# Altium PCB PCB3.PcbDoc
Units mil, origin at the board's own origin, x right, y up, seen from the top; angles counter-clockwise.
Board outline 6000 x 4000 mil, 2 copper layers (Top Layer, Bottom Layer); 144 components, 101 nets, 375 pads, 0 vias.
Unrouted connection lines stored in the file: 258.
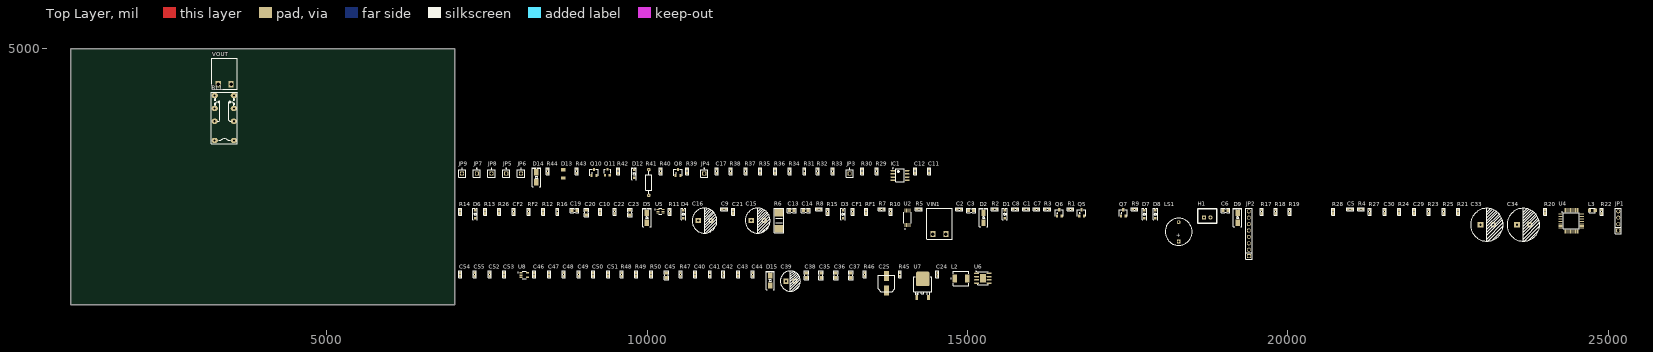
[diagram p0: Top Layer view]
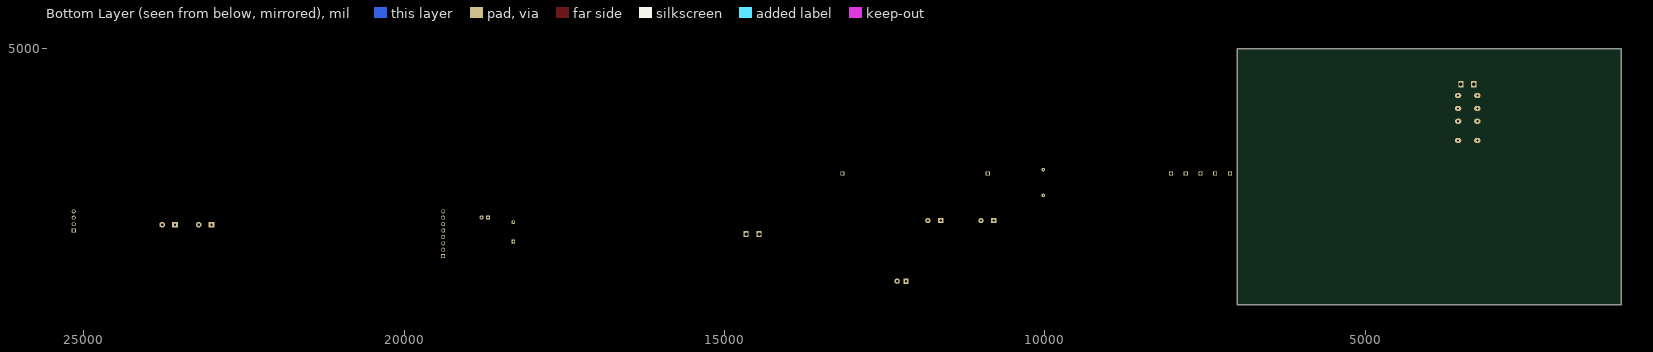
[diagram p1: Bottom Layer view, seen from below]

## Layer stack, top to bottom
Top Solder: solder mask 0.4, Solder Resist, Dk 3.5
Top Layer: signal copper 1.4
Dielectric 1: dielectric 12.6, FR-4, Dk 4.8
Bottom Layer: signal copper 1.4
Bottom Solder: solder mask 0.4, Solder Resist, Dk 3.5

## Board outline
1000,1000 7000,1000 7000,5000 1000,5000

## Design rules (kind name [scope] priority, off if disabled: settings)
Clearance [All] p1: gap=10 ignorepadtopadclearanceinfootprint=FALSE except(0: Arc-Hole Track-Hole SMDPad-Hole THPad-Hole Via-Hole Fill-Hole Poly-Hole Region-Hole Text-Hole)
DiffPairsRouting [All] p1: maxlimit=10 minlimit=10 mostfreqgap=10 toplayer_minwidth=15 toplayer_maxwidth=15 toplayer_prefwidth=15 bottomlayer_minwidth=15 bottomlayer_maxwidth=15 bottomlayer_prefwidth=15 maxuncoupledlength=500
PolygonConnect [All] p1: connectstyle=Relief reliefconductorwidth=10 reliefentries=4 polygonreliefangle="90 Angle" airgapwidth=10
RoomDefinition Solider [InComponentClass('Solider')] p1: confinementstyle=ConfineIn formatcopy=TRUE lockcomponents=FALSE outline 7045,2670 14530,2670 14530,3250 7045,3250
RoomDefinition Sheet2 [InComponentClass('Sheet2')] p2: confinementstyle=ConfineIn formatcopy=TRUE lockcomponents=FALSE outline 7045,1690 25270,1690 25270,2620 7045,2620
RoomDefinition power [InComponentClass('power')] p3: confinementstyle=ConfineIn formatcopy=TRUE lockcomponents=FALSE outline 7045,1060 15395,1060 15395,1640 7045,1640
RoutingVias [All] p1: holewidth=28 width=50 viastyle="Through Hole" minholewidth=28 minwidth=50 maxholewidth=28 maxwidth=50
SolderMaskExpansion [All] p1: expansion=4 istentingtop=FALSE
Width [All] p1: maxlimit=10 minlimit=10 preferedwidth=10
29 further rules are at their usual default settings.

## Classes and differential pairs
component class Solider: C11 C12 C17 D10 D11 D12 D13 D14 IC1 JP3 JP4 JP5 JP6 JP7 JP8 JP9 Q8 Q9 Q10 Q11 R29 R30 R31 R32 R33 R34 R35 R36 R37 R38 R39 R40 R41 R42 R43 R44
component class Sheet2: C1 C2 C3 C5 C6 C7 C8 C9 C10 C13 C14 C15 C16 C19 C20 C21 C22 C23 C26 C27 C28 C29 C30 C31 C32 C33 C34 CF1 CF2 D1 D2 D3 D4 D5 D6 D7 D8 D9 H1 JP1 JP2 L1 L3 LS1 NT1 NT2 NT3 NTC1 Q1 Q2 Q3 Q4 Q5 Q6 Q7 R1 R2 R3 R4 R5 R6 R7 R8 R9 R10 R11 R12 R13 R14 R15 R16 R17 R18 R19 R20 R21 R22 R23 R24 R25 R26 R27 R28 RF1 RF2 RL1 SW1 U1 U2 U3 U4 U5 VIN1 VOUT XT1
component class power: AMS1 C24 C25 C35 C36 C37 C38 C39 C40 C41 C42 C43 C44 C45 C46 C47 C48 C49 C50 C51 C52 C53 C54 C55 D15 L2 NT4 R45 R46 R47 R48 R49 R50 U6 U7 U8
differential pair SO1: +SO1_P -SO1_N

## Components (designator, comment, footprint, x,y, rotation, side; value= is the part's Value field where it differs from the comment)
C1 "104" "tu 0603" 15915,2490 r0 top
C2 "104" "tu 0603" 14870,2490 r0 top
C3 "104" "tu 0805" 15055,2475 r0 top
C5 "102" "tu 0603" 20970,2490 r0 top
C6 "10pF" "tu 0805" 19025,2475 r0 top
C7 "103" "tu 0603" 16075,2490 r0 top
C8 "104" "tu 0603" 15745,2490 r0 top
C9 "103" "tu 0603" 11200,2490 r0 top
C10 "104" "tu 0603" 9270,2455 r90 top
C11 "103" "tu 0603" 14400,3085 r90 top
C12 "104" "tu 0603" 14180,3085 r90 top
C13 "100" "tu 0805" 12255,2475 r0 top
C14 "100" "tu 0805" 12475,2475 r0 top
C15 "1000uF" "tu hoa 10mm" 11725,2315 r0 top
C16 "1000uF" "tu hoa 10mm" 10895,2315 r0 top
C17 "102" "tu 0603" 11085,3085 r90 top
C19 "100" "tu 0805" 8865,2475 r0 top
C20 "100" "tu 0805" 9050,2440 r90 top
C21 "104" "tu 0603" 11340,2455 r90 top
C22 "104" "tu 0603" 9490,2455 r90 top
C23 "104" "tu 0805" 9730,2440 r90 top
C24 "104" "tu 0603" 14530,1475 r90 top
C25 "220uF" "tu nhom 6.3 (d)" 13735,1335 r90 top
C29 "102" "tu 0603" 21970,2455 r90 top
C30 "102" "tu 0603" 21510,2455 r90 top
C33 "1000uF" "tu hoa 13mm" 23105,2250 r0 top
C34 "1000uF" "tu hoa 13mm" 23675,2250 r0 top
C35 "106" "tu 0805" 12715,1460 r90 top
C36 "106" "tu 0805" 12945,1460 r90 top
C37 "106" "tu 0805" 13180,1460 r90 top
C38 "22pF" "tu 0805" 12485,1460 r90 top
C39 "100uF" "tu hoa 8mm" 12235,1370 r0 top
C40 "104" "tu 0603" 10750,1475 r90 top
C41 "104" "tu 0603" 10980,1475 r90 top
C42 "104" "tu 0603" 11190,1475 r90 top
C43 "104" "tu 0603" 11420,1475 r90 top
C44 "104" "tu 0603" 11650,1475 r90 top
C45 "22pF" "tu 0805" 10300,1460 r90 top
C46 "104" "tu 0603" 8240,1475 r90 top
C47 "104" "tu 0603" 8470,1475 r90 top
C48 "104" "tu 0603" 8700,1475 r90 top
C49 "104" "tu 0603" 8930,1475 r90 top
C50 "104" "tu 0603" 9160,1475 r90 top
C51 "104" "tu 0603" 9390,1475 r90 top
C52 "106" "tu 0603" 7540,1475 r90 top
C53 "104" "tu 0603" 7770,1475 r90 top
C54 "106" "tu 0603" 7080,1475 r90 top
C55 "106" "tu 0603" 7310,1475 r90 top
CF1 "102" "tu 0603" 13210,2455 r90 top
CF2 "102" "tu 0603" 7920,2455 r90 top
D1 "S4" "DIODE SOD-123" 15580,2415 r90 top
D2 "SS34" "DIODE SMA" 15250,2360 r90 top
D3 "S4" "DIODE SOD-123" 13055,2415 r90 top
D4 "S4" "DIODE SOD-123" 10565,2415 r90 top
D5 "SS34" "DIODE SMA" 9995,2360 r90 top
D6 "S4" "DIODE SOD-123" 7315,2415 r90 top
D7 "S4" "DIODE SOD-123" 17760,2415 r90 top
D8 "S4" "DIODE SOD-123" 17930,2415 r90 top
D9 "SS34" "DIODE SMA" 19215,2360 r90 top
D12 "S4" "DIODE SOD-123" 9795,3045 r90 top
D13 "15V" "DIODE ZENNER SMD SOD80" 8690,3045 r90 top
D14 "SS34" "DIODE SMA" 8270,2990 r90 top
D15 "SS34" "DIODE SMA" 11920,1380 r90 top
H1 "FAN" XH2.54M-2 18690,2365 r0 top
IC1 "LM358 SOP8" "SOP 8" 13945,3020 r0 top
JP1 "debug" "JP 1x4 DT" 25155,2160 r90 top
JP2 "lcd_1.8 inch" "JP 1x8 DT" 19390,1760 r90 top
JP3 "SLEEP" "JP 1x1 DT" 13160,3050 r0 top
JP4 "TIP CHANGER" "JP 1x1 DT" 10890,3050 r0 top
JP5 "5" "JP 1x1 DT" 7800,3050 r0 top
JP6 "1" "JP 1x1 DT" 8030,3050 r0 top
JP7 "4" "JP 1x1 DT" 7340,3050 r0 top
JP8 "2" "JP 1x1 DT" 7570,3050 r0 top
JP9 "3" "JP 1x1 DT" 7110,3050 r0 top
L2 "10uH" "CUON CAM SMD 0530" 14900,1410 r0 top
L3 "LED 0805" LED-0805-Red 24705,2475 r0 top
LS1 "Coi Chip Speaker" "Coi Chip Speacker" 18295,1990 r90 top
Q5 "HF" SOT-23 16780,2435 r0 top value=C9014
Q6 "HF" SOT-23 16430,2435 r0 top value=C9014
Q7 "BC817" SOT-23 17430,2435 r0 top value=C9014
Q8 "BC817" SOT-23 10480,3065 r0 top value=C9014
Q10 "BC817" SOT-23 9170,3065 r0 top value=C9014
Q11 "BA" SOT23 9380,3070 r0 top
R1 "4.7K" "Tro smd 0603" 16605,2490 r0 top
R2 "2.2R" "Tro smd 0603" 15425,2490 r0 top
R3 "4.7K" "Tro smd 0603" 16245,2490 r0 top
R4 "10k" "tro smd 0603" 21140,2490 r0 top
R5 "10R" "Tro smd 0603" 14240,2490 r0 top
R6 "0.01R" "tro smd 2512" 12055,2315 r90 top
R7 "10R" "Tro smd 0603" 13660,2490 r0 top
R8 "2.2R" "Tro smd 0603" 12680,2490 r0 top
R9 "10k" "Tro smd 0603" 17605,2490 r0 top
R10 "22R" "Tro smd 0603" 13800,2455 r90 top
R11 "2.2R" "Tro smd 0603" 10350,2455 r90 top
R12 "10R" "Tro smd 0603" 8380,2455 r90 top
R13 "10R" "Tro smd 0603" 7470,2455 r90 top
R14 "2.2R" "Tro smd 0603" 7080,2455 r90 top
R15 "22R" "Tro smd 0603" 12820,2455 r90 top
R16 "22R" "Tro smd 0603" 8600,2455 r90 top
R17 "10k" "Tro smd 0603" 19590,2455 r90 top
R18 "10k" "Tro smd 0603" 19810,2455 r90 top
R19 "10k" "Tro smd 0603" 20030,2455 r90 top
R20 "10k" "tro smd 0603" 24015,2455 r90 top
R21 "10k" "tro smd 0603" 22660,2455 r90 top
R22 "10k" "Tro smd 0603" 24900,2455 r90 top
R23 "100k" "tro smd 0603" 22200,2455 r90 top
R24 "100k" "tro smd 0603" 21740,2455 r90 top
R25 "10k" "Tro smd 0603" 22430,2455 r90 top
R26 "22R" "Tro smd 0603" 7690,2455 r90 top
R27 "10k" "Tro smd 0603" 21280,2455 r90 top
R28 "10k" "Tro smd 0603" 20710,2455 r90 top
R29 "10k" "Tro smd 0603" 13585,3085 r90 top
R30 "100k" "Tro smd 0603" 13355,3085 r90 top
R31 "4.7k" "Tro smd 0603" 12455,3085 r90 top
R32 "100k" "Tro smd 0603" 12665,3085 r90 top
R33 "10R" "Tro smd 0603" 12895,3085 r90 top
R34 "10k" "Tro smd 0603" 12225,3085 r90 top
R35 "4.7k" "Tro smd 0603" 11765,3085 r90 top
R36 "1k" "Tro smd 0603" 11995,3085 r90 top
R37 "100k" "Tro smd 0603" 11535,3085 r90 top
R38 "10k" "Tro smd 0603" 11305,3085 r90 top
R39 "10R" "Tro smd 0603" 10625,3085 r90 top
R40 "4.7k" "Tro smd 0603" 10210,3085 r90 top
R41 "680R" "tro vach 1/4w" 10025,2910 r90 top
R42 "1k" "Tro smd 0603" 9550,3085 r90 top
R43 "1k" "Tro smd 0603" 8900,3085 r90 top
R44 "10R" "Tro smd 0603" 8450,3085 r90 top
R45 "100k" "tro smd 0603" 13945,1475 r90 top
R46 "100k" "tro smd 0603" 13395,1475 r90 top
R47 "100k" "tro smd 0603" 10520,1475 r90 top
R48 "25k" "tro smd 0603" 9600,1475 r90 top
R49 "100k" "tro smd 0603" 9830,1475 r90 top
R50 "100k" "tro smd 0603" 10060,1475 r90 top
RF1 "1K" "Tro smd 0603" 13420,2455 r90 top
RF2 "1K" "Tro smd 0603" 8150,2455 r90 top
RL1 "Relay 1A/5V" "Relay 8 Chan HK19F" 3250,3565 r90 top
U2 "INA240A4PWR" SOP65P640X120-8N 14060,2360 r90 top
U4 "STM32F103C8T6" LQFP-48_19.6_393_58X11_SMD 24420,2310 r0 top
U5 "INA199A3DCKR" SOT65P210X110-6N 10205,2460 r0 top
U6 "MP1584EN" SOIC127P600X170-9N 15240,1415 r0 top
U7 "78M12 SMD TO252" TO252 14300,1260 r0 top
U8 "LP5907MFX-2.85/NOPB" SOT95P280X145-5N 8080,1465 r0 top
VIN1 "CON 2 EDG5.08" "CON 2 2EDG5.08" 14460,2105 r0 top
VOUT "CON 2 EDG5.08" "CON 2 2EDG5.08" 3305,4445 r0 top

## Footprints (in the part's own frame and the unit in brackets; to place one, negate y for a bottom-side part, rotate by r counter-clockwise, add the part's x,y. Pads: shape width x height; smd on the part's side, far side on the other; paste and mask are expansions set on the pad)
"Coi Chip Speacker" [mm]
  rect 1.5x1.5 hole 0.8: 1(0,0)
  round 1.5 hole 0.8: 2(7.62,0.013)
  silkscreen extent -1.55,-5.38 9.18,5.36, body extent -2.22,-6 13.24,6, height 4.5
"CON 2 2EDG5.08" [mm]
  rect 2x2.5 hole 1.4: 1(0,0) 2(5.08,0)
  silkscreen extent -2.54,-2.03 7.62,10.21, body extent -2.5,-1.75 7.58,10.25, height 3.15
"CUON CAM SMD 0530" [mm] "CUON CAM SMD 0530"
  rect 1.8x3.1 smd: 1(-2.5,0) 2(2.5,0)
  silkscreen extent -4.1,-2.9 3.1,2.9, body extent -3.1,-2.88 3.1,2.92, height 3
"DIODE SMA" [mm] "SMA"
  rect 2.5x1.7 smd: 1(-2,0) 2(2,0)
  silkscreen extent -3.68,-1.65 3.75,1.65, body extent -2.6,-1.37 2.6,1.37, height 2.4
"DIODE SOD-123" [mm] "SOD-123"
  rect 0.9x0.95 smd: 1(-1.575,0) 2(1.575,0)
  silkscreen extent -2.3,-0.92 2.41,0.92, body extent -1.86,-0.78 1.86,0.77, height 1.35
"DIODE ZENNER SMD SOD80" [mm] "SOD80"
  rect 1.35x1.8 smd: 1(1.675,0) 2(-1.675,0)
  body extent -1.75,-0.76 1.75,0.74, height 1.45
"JP 1x1 DT" [mm] "1pins, 1 row, straight, gold plating"
  rect 1.6x1.6 hole 1.1: 1(0,0)
  silkscreen extent -1.4,-1.4 1.4,2.17, body extent -1.27,-1.27 1.27,1.27, height 8.54
"JP 1x4 DT" [mm] "4 pins, 1 row, straight, gold plating"
  rect 1.6x1.6 hole 1.1: 1(0,0)
  round 1.6 hole 1.1: 2(2.54,0) 3(5.08,0) 4(7.62,0)
  silkscreen extent -1.27,-1.27 8.89,1.27, body extent -1.27,-1.27 8.89,1.27, height 8.54
"JP 1x8 DT" [mm] "8 pins, 1 row, straight, gold plating"
  rect 1.6x1.6 hole 1.1: 1(0,0)
  round 1.6 hole 1.1: 2(2.54,0) 3(5.08,0) 4(7.62,0) 5(10.16,0) 6(12.7,0) 7(15.24,0) 8(17.78,0)
  silkscreen extent -1.27,-1.27 19.05,1.27, body extent -1.27,-1.27 19.05,1.27, height 8.54
LED-0805-Red [mil]
  rect 50x55 smd: 1(0,0) 2(90,0)
  silkscreen extent 0,-35 90,35, body extent 5,-25 85,25, height 43
LQFP-48_19.6_393_58X11_SMD [mm] "48LQFP"
  rect 1.7x0.3 smd mask+0.076: 1(-4.238,2.75) 2(-4.238,2.25) 3(-4.238,1.75) 4(-4.238,1.25) 5(-4.238,0.75) 6(-4.238,0.25) 7(-4.238,-0.25) 8(-4.238,-0.75) 9(-4.238,-1.25) 10(-4.238,-1.75) 11(-4.238,-2.25) 12(-4.238,-2.75) 25(4.238,-2.75) 26(4.238,-2.25) 27(4.238,-1.75) 28(4.238,-1.25) 29(4.238,-0.75) 30(4.238,-0.25) 31(4.238,0.25) 32(4.238,0.75) 33(4.238,1.25) 34(4.238,1.75) 35(4.238,2.25) 36(4.238,2.75)
  rect 0.3x1.7 smd mask+0.076: 13(-2.75,-4.238) 14(-2.25,-4.238) 15(-1.75,-4.238) 16(-1.25,-4.238) 17(-0.75,-4.238) 18(-0.25,-4.238) 19(0.25,-4.238) 20(0.75,-4.238) 21(1.25,-4.238) 22(1.75,-4.238) 23(2.25,-4.238) 24(2.75,-4.238) 37(2.75,4.238) 38(2.25,4.238) 39(1.75,4.238) 40(1.25,4.238) 41(0.75,4.238) 42(0.25,4.238) 43(-0.25,4.238) 44(-0.75,4.238) 45(-1.25,4.238) 46(-1.75,4.238) 47(-2.25,4.238) 48(-2.75,4.238)
  silkscreen extent -3.72,-3.15 3.15,3.72, body extent -4.5,-4.5 4.5,4.5, height 1.7
"Relay 8 Chan HK19F" [mil] "Reley DPDT, 8 pin, 1A, W400mil, L800mil,H 300mil"
  oval 80x100 hole 32: 1(500,0) 2(300,0) 3(701,0) 4(500,-300) 5(300,-300) 6(701,-300) 7(0,-300) 8(0,0)
  silkscreen extent -50,-349 752,51, body extent -59,-340 759,46, height 484
SOIC127P600X170-9N [mm]
  rrect54% 1.97x0.6 smd paste+0 mask+0.102: 1(-2.475,1.905) 2(-2.475,0.635) 3(-2.475,-0.635) 4(-2.475,-1.905) 5(2.475,-1.905) 6(2.475,-0.635) 7(2.475,0.635) 8(2.475,1.905)
  rect 2.41x3.3 smd paste-3 mask+0.102: 9(0,0)
  silkscreen extent -2.77,-2.5 2,2.84, body extent -3,-2.45 3,2.45, height 1.7
SOP65P640X120-8N [mm]
  rrect25% 1.57x0.41 smd: 1(-2.87,0.975) 2(-2.87,0.325) 3(-2.87,-0.325) 4(-2.87,-0.975) 5(2.87,-0.975) 6(2.87,-0.325) 7(2.87,0.325) 8(2.87,0.975)
  silkscreen extent -4.54,-1.5 2.2,1.5, body extent -3.2,-1.5 3.2,1.5, height 1.2
"SOP 8" [mm] "SOIC, 8-Leads, Body 4.9x3.9mm, Pitch 1.27mm, IPC High Density"
  oval 1.8x0.6 smd: 1(-2.825,1.905) 2(-2.825,0.635) 3(-2.825,-0.635) 4(-2.825,-1.905) 5(2.825,-1.905) 6(2.825,-0.635) 7(2.825,0.635) 8(2.825,1.905)
  silkscreen extent -2.95,-2.55 1.68,2.98, body extent -2.99,-2.45 3,2.45, height 1.6
SOT23 [mm] "SOT23"
  rect 0.9x0.95 smd: 1(-0.95,-1.25) 2(0,1.25)
  rect 0.9x0.95 smd mask+0: 3(0.95,-1.25)
  silkscreen extent -1.3,-0.38 1.3,1.25, body extent -1.52,-1.23 1.48,1.27, height 1.06
SOT65P210X110-6N [mm]
  rrect25% 1.19x0.4 smd: 1(-0.96,0.65) 2(-0.96,0) 3(-0.96,-0.65) 4(0.96,-0.65) 5(0.96,0) 6(0.96,0.65)
  silkscreen extent -2.2,-1.17 0.63,1.17, body extent -1.05,-1 1.05,1, height 1.1
SOT95P280X145-5N [mm]
  rrect25% 1.21x0.58 smd paste+0 mask+0.102: 1(-1.255,0.95) 2(-1.255,0) 3(-1.255,-0.95) 4(1.255,-0.95) 5(1.255,0.95)
  silkscreen extent -2.6,-1.56 0.8,1.56, body extent -1.4,-1.45 1.4,1.45, height 1.45
SOT-23 [mm] "SOT 23 _ 1-3-2"
  rect 0.85x1.2 smd: 1(-0.94,-1.245) 2(0.985,-1.25) 3(0.005,1.25)
  silkscreen extent -1.65,-1.27 1.65,1.27, body extent -1.47,-1.33 1.53,1.17, height 1.06
TO252 [mm] "TO252"
  round 0.5 on Mech15: 0(0,0)
  rrect25% 1x2 smd: 1(-2.285,-3.7) 3(2.285,-3.7)
  rrect25% 5.5x5.7 smd: 2(0,3.7)
  silkscreen extent -3.5,-2.7 3.5,4.5, body extent -3.3,-3.95 3.3,5.76, height 2.31
"Tro smd 0603" [mm] "Chip Capacitor, 2-Leads, Body 1,60x0,80mm, IPC Medium Density"
  rect 1x0.95 smd mask+0.076: 1(-0.75,0) 2(0.75,0)
  silkscreen extent -1.35,-0.58 1.37,0.58, body extent -0.82,-0.42 0.82,0.43, height 0.44
"tro smd 0603" [mm] "Chip Capacitor, 2-Leads, Body 1,60x0,80mm, IPC Medium Density"
  rect 1x0.95 smd mask+0.076: 1(-0.75,0) 2(0.75,0)
  silkscreen extent -1.35,-0.58 1.37,0.58, body extent -0.82,-0.42 0.82,0.43, height 0.44
"tro smd 2512" [mm]
  rect 3x3.3 smd: 1(-3.2,0) 2(3.2,0)
  silkscreen extent -4.9,-1.88 4.93,1.88, body extent -3.12,-1.57 3.18,1.58, height 0.82
"tro vach 1/4w" [mm]
  round 1.4 hole 0.6: 1(-5.1,0) 2(5.1,0)
  silkscreen extent -4.39,-1.25 4.42,1.25, body extent -5.38,-1.2 5.38,1.2, height 2.41
"tu 0603" [mm] "Chip Capacitor, 2-Leads, Body 1,60x0,80mm, IPC Medium Density"
  rect 1x0.95 smd mask+0.076: 1(-0.75,0) 2(0.75,0)
  silkscreen extent -1.35,-0.58 1.37,0.58, body extent -0.8,-0.4 0.8,0.4, height 0.9
"tu 0805" [mm] "Compoment SMD 80x50mil"
  rect 1.2x1.4 smd: 1(-0.946,-0.003) 2(0.954,-0.003)
  silkscreen extent -1.75,-0.89 1.75,0.89, body extent -1.01,-0.64 1.01,0.63, height 0.61
"tu hoa 8mm" [mm]
  rect 2.1x2.1 hole 0.9: 1(-1.75,0)
  round 2.1 hole 0.9: 2(1.75,0)
  silkscreen extent -4,-4 4,4, body extent -4.1,-4.07 4.1,4.13, height 13.81
"tu hoa 10mm" [mm]
  rect 2.1x2.1 hole 0.9: 1(-2.54,0)
  round 2.1 hole 0.9: 2(2.54,0)
  silkscreen extent -4.95,-4.96 4.93,4.92, body extent -5,-5 4.97,5, height 20.01
"tu hoa 13mm" [mm]
  rect 2.2x2.2 hole 0.9: 1(-2.54,0)
  round 2.2 hole 0.9: 2(2.54,0)
  silkscreen extent -6.5,-6.5 6.5,6.5, body extent -6.25,-6.25 6.26,6.25, height 23.02
"tu nhom 6.3 (d)" [mm]
  rect 4x2 smd: 1(-2.9,0) 2(2.9,0)
  silkscreen extent -3.3,-3.3 3.3,3.3, body extent -3.8,-3.3 3.8,3.3, height 8
XH2.54M-2 [mm]
  rect 1.6x1.6 hole 0.8: 1(0,0)
  round 1.6 hole 0.8: 2(2.54,0)
  silkscreen extent -2.48,-2.26 5.02,3.46, body extent -2.48,-2.26 5.02,3.48, height 6.91

## Part data
C1 C2 C21 C22 C40 C41 C42 C43 C44 C46 C47 C48 C49 C50 C51: library part "Tu 0603 101 50V 10%", "Dán", Chung_Loai=Dán, Don_Vi=Con, Ma_Hang=MH004565, So_Chan=2, Ten_Linh_Kien="Tụ 0603 101-0.1nF 10% 50V"
C3 C6 C23: library part "Tu 0805 101 50V 20%", "Dán", Chung_Loai=Dán, Don_Vi=Con, Ma_Hang=MH002806, So_Chan=2, Ten_Linh_Kien="Tụ 0805 101-0.1nF 50V 20%"
C5 C24 C29 C30: library part "Tu 0603 104 50V 10%", "Dán", Chung_Loai=Dán, Don_Vi=Con, Ma_Hang=MH004568, So_Chan=2, Ten_Linh_Kien="Tụ 0603 104-100nF 10% 50V"
C7 C8 C9 C10 C11 C12 C17 C52 C53 C54 C55 CF1 CF2: library part "Tu 0603 106 16V 20%", "Dán", Chung_Loai=Dán, Don_Vi=Con, Ma_Hang=MH004848, So_Chan=2, Ten_Linh_Kien="Tụ 0603-10uF 20% 16V"
C13 C14 C19 C20: library part "Tu 0805 104 50V 10%", "Dán", Chung_Loai=Dán, Don_Vi=Con, Ma_Hang=MH004551, So_Chan=2, Ten_Linh_Kien="Tụ 0805 104-100nF 10% 50V"
C15 C16: library part "Tu Hoa 1000uF 10V 10x12", "Cắm", Chung_Loai=Cắm, Don_Vi=Con, Ma_Hang=MH006614, So_Chan=2, Ten_Linh_Kien="Tụ Hóa 1000uF 10V 10x12MM"
C25: library part "Tu Nhom 220uF 16V", "Dán", Chung_Loai=Dán, Don_Vi=Con, Ma_Hang=MH002227, So_Chan=2, Ten_Linh_Kien="Tụ Nhôm 220uF 16V 6.3x7.7MM"
C33 C34: library part "Tu Hoa 1000uF 50V 13x26", "Cắm", Chung_Loai=Cắm, Don_Vi=Con, Ma_Hang=MH006619, So_Chan=2, Ten_Linh_Kien="Tụ Hóa 1000uF 50V"
C35 C36 C37 C38 C45: library part "Tu 0805 106 16V 10%", "Dán", Chung_Loai=Dán, Don_Vi=Con, Ma_Hang=MH004553, So_Chan=2, Ten_Linh_Kien="Tụ 0805 106-10uF 10% 16V"
C39: library part "Tu Hoa 100uF 35V 8x11", "Cắm", Chung_Loai=Cắm, Don_Vi=Con, Ma_Hang=MH002807, So_Chan=2, Ten_Linh_Kien="Tụ Hóa 100uF 35V 8x11MM"
D1 D3 D4 D6 D7 D8 D12: library part "Diode S4", "Dán", Chung_Loai=Dán, Don_Vi=Con, Ma_Hang=MH005519, Ten_Linh_Kien="Diode S4 SOD123 ( 1N5819 SOD123)"
D2 D5 D9 D14 D15: library part "Diode SS34 ( 1N5822 )", "Dán", Chung_Loai=Dán, Don_Vi=Con, Ma_Hang=MH002104, Ten_Linh_Kien="Diode SS34 3A 40V SMA ( 1N5822 SS34A)"
D13: library part "Diode Zener 15V", "Dán", Chung_Loai=Dán, Don_Vi=Con, Ma_Hang=MH002883, Ten_Linh_Kien="Diode Zener 1/2W 15V SMD1206 ZMM15"
H1: library part "Header 2P 2.54 Duc Thang", "Cắm", Chung_Loai=Cắm, Don_Vi=Con, Ma_Hang=MH001283, Ten_Linh_Kien="Header 2P XH2.54-2P Đực Thẳng"
IC1: "Dán", Chung_Loai=Dán, Don_Vi=Con, Ma_Hang=MH000609, Ten_Linh_Kien="LM358 SOP8"
JP1: library part "JP 1x4 2.54 Duc Thang", "Cắm", Chung_Loai=Cắm, Don_Vi=Con, Ma_Hang=MH000903, Ten_Linh_Kien="Jump Đơn Đực 2.54MM 1x40P Thẳng 11MM"
JP2: library part "JP 1x8 2.54 Duc Thang", "Cắm", Chung_Loai=Cắm, Don_Vi=Con, Ma_Hang=MH000903, Ten_Linh_Kien="Jump Đơn Đực 2.54MM 1x40P Thẳng 11MM"
JP3 JP4 JP5 JP6 JP7 JP8 JP9: library part "JP 1x1 2.54 Duc Cong", "Cắm", Chung_Loai=Cắm, Don_Vi=Con, Ma_Hang=MH000904, Ten_Linh_Kien="Jump Đơn Đực 2.54MM 1x40P Cong Đứng"
L2: library part "Cuon Cam SMD 0530", "SMD 0530", Package=None, Availability=Unavailable, MP=FDV0530-H-1R5M=P3, Price=None
L3: library part "LED 0805 Do", "Dán", Chung_Loai=Dán, Don_Vi=Con, Ma_Hang=MH000897, Ten_Linh_Kien="LED 0805 Màu Đỏ (Red)"
LS1: "Còi chip"
Q5 Q6: library part "Trans C1815 HF SMD", "SOT-23"
Q7 Q8 Q10: library part "Trans BC817", "SOT-23 - C8658"
Q11: library part "Trans A1015 BA SMD", "PNP 600mW, ECB"
R1 R2 R3 R5 R7 R8 R9 R10 R11 R12 R13 R14 R15 R16 R17 R18 R19 R22 R25 R26 R27 R28 R29 R30 R31 R32 R33 R34 R35 R36 R37 R38 R39 R40 R42 R43 R44 RF1 RF2: library part "Tro 0603 5% 10R", "Dán", Chung_Loai=Dán, Don_Vi=Con, Ma_Hang=MH006317, So_Chan=2, Ten_Linh_Kien="Trở 0603 5% 10R"
R4 R20 R21 R23 R24: library part "Tro 0603 5% 10k", "Dán", Chung_Loai=Dán, Don_Vi=Con, Ma_Hang=MH006316, So_Chan=2, Ten_Linh_Kien="Trở 0603 5% 10k"
R6: library part "Tro 2512 1% 0.01R", "Dán", Chung_Loai=Dán, Don_Vi=Con, Ma_Hang=MH004912, So_Chan=2, Ten_Linh_Kien="Trở 2512 1% R010-0.01R 1W"
R41: library part "Tro Vach 1/4W 5% 680R", "Cắm", Chung_Loai=Cắm, Don _Vi=Con, Ma_Hang=MH007331, So_Chan=2, Ten_Linh_Kien="Trở Vạch 1/4w 5% 680R"
R45 R46 R47 R48 R49 R50: library part "Tro 0603 1% 0R", "Dán", Chung_Loai=Dán, Don_Vi=Con, Ma_Hang=MH005792, So_Chan=2, Ten_Linh_Kien="Trở 0603 1% 0R"
RL1: library part "Relay 8 Chan HK19F", "Relay 8 Chan HK19F", Ma_Hang=MH001504, Ten="Relay 5V1A 8 Chân HK19F-DC05V-SHG"
U2: "-4 to 80V, bidirectional, ultra-precise current sense amplifier with enhanced PWM rejection", Package="TSSOP-8 Texas Instruments", Check_prices=https://www.snapeda.com/parts/INA240A4PWR/Texas+Instruments/view-part/?ref=eda, MF="Texas Instruments", MP=INA240A4PWR, SnapEDA_Link=https://www.snapeda.com/parts/INA240A4PWR/Texas+Instruments/view-part/?ref=snap
U4: library part IC_STM32F103C8T6, "ARM® Cortex®-M3 STM32F1 Microcontroller IC 32-Bit 72MHz 64KB (64K x 8) FLASH 48-LQFP (7x7)", Alternate Part Number-1=NA, Case/Package=LQFP48, Manufacturer=STMicroelectronics, Manufacturer Part Number=STM32F103C8T6, Supplier Part Number-1=STM32F103C8T6, Supplier-1=LCSC
U5: "26V, bi-directional current sense amplifier", Package="SOT-SC70-6 Texas Instruments", Check_prices=https://www.snapeda.com/parts/INA199A3DCKR/Texas+Instruments/view-part/?ref=eda, MF="Texas Instruments", MP=INA199A3DCKR, SnapEDA_Link=https://www.snapeda.com/parts/INA199A3DCKR/Texas+Instruments/view-part/?ref=snap
U6: "Buck Switching Regulator IC Positive Adjustable 0.8V 1 Output 3A 8-SOIC (0.154, 3.90mm Width) Exposed Pad", Package="SOIC-8 Monolithic Power", Check_prices=https://www.snapeda.com/parts/MP1584EN/Monolithic+Power+Systems/view-part/?ref=eda, MF="Monolithic Power", MP=MP1584EN, SnapEDA_Link=https://www.snapeda.com/parts/MP1584EN/Monolithic+Power+Systems/view-part/?ref=snap
U7: library part "78M05 SMD TO252", "Dán", Chung_Loai=Dán, Don_Vi=Con, Ma_Hang=MH001917, Ten_Linh_Kien="78M05 TO252"
U8: "250-mA, low-noise, high-PSRR, ultra-low-dropout voltage regulator with low IQ and enable", Package="SOT-23-5 Texas Instruments", Check_prices=https://www.snapeda.com/parts/LP5907MFX-2.85/NOPB/Texas+Instruments/view-part/?ref=eda, MF="Texas Instruments", MP=LP5907MFX-2.85/NOPB, SnapEDA_Link=https://www.snapeda.com/parts/LP5907MFX-2.85/NOPB/Texas+Instruments/view-part/?ref=snap
VIN1 VOUT: "Cắm", Chung_Loai=Cắm, Don_Vi=Con, Ma_Hang=MH000759, Ten_Linh_Kien="CON 2 2EDG5.08-2P 5.08MM ( Xanh Cong)"

## Nets (pads, with @x,y where several pads share a name; then routed paths per layer and width w, separated by ;. In a path a pad name is that pad's centre, name@x,y a point inside that pad or via, vN(x,y) a via of type N, cw(c..) or ccw(c..) an arc to the next point about the centre after c; other vN are vias at no path point)
3v3: C48.1 C49.1 C50.1 C51.1 JP1.1 JP2.1 JP2.8 R4.1 R17.2 R18.2 R19.2 R27.2 R29.2 R38.2 U4.9 U4.24 U4.48
+5: C25.1 C46.1 C47.1 C54.1 C55.1 D7.2 D8.2 H1.1 L2.2 LS1.1 R46.2 U8.1 U8.3
+12: C1.1 C6.1 C21.1 C39.1 C43.1 C44.1 D2.1 D5.1 D9.2 RL1.7 U7.3
A0: JP2.5 U4.18
AGND: C7.1 C8.1 C9.2 C10.2 C11.2 C12.2 C17.1 C52.2 C53.2 CF1.1 CF2.1 IC1.4 R37.2 U2.4 U2.6 U2.7 U5.1 U5.2 U8.2
AVCC: C7.2 C8.2 C9.1 C10.1 C11.1 C12.1 C52.1 C53.1 IC1.8 U2.5 U5.3 U8.5
Blue: D14.1 JP5.1 JP8.1 RL1.6
buzzer: R1.1 U4.3
CLK: JP1.3 U4.37
CS: JP2.3 U4.21
current_sense: CF1.2 CF2.2 RF1.2 RF2.2 U4.12
en_buck: R45.1 R48.2 U6.2
enc_a: R19.1 U4.38
enc_b: R18.1 U4.39
enc_c: R17.1 U4.40
fan: R3.1 U4.4
GND: C1.2 C5.1 C21.2 C25.2 C29.1 C30.1 C35.2 C36.2 C37.2 C39.2 C40.2 C41.2 C42.2 C43.2 C44.2 C45.2 C46.2 C47.2 C48.2 C49.2 C50.2 C51.2 C54.2 C55.2 D13.1 D15.1 JP1.4 JP2.2 L3.2 Q5.2 Q6.2 Q10.2 Q11.3 R22.2 R23.2 R24.2 R28.1 R34.2 R47.1 R48.1 R49.1 R50.1 U4.8 U4.23 U4.35 U4.47 U6.5 U6.9 U7.2
Green: JP7.1 R31.2
heater: U4.28
HS1: C13.2 D1.1 R5.2
HS2: C14.1 D4.1 R12.2
IO: JP1.2 U4.34
LS1: C19.1 D3.1 R7.2
LS2: C20.1 D6.1 R13.2
MISO: U4.16
MOSI: JP2.6 U4.17
NetC2_1: C2.1 C3.2 D2.2
NetC6_2: C6.2 D9.1 Q7.3 RL1.8
NetC17_2: C17.2 IC1.5 R36.2
NetC22_2: C22.2 C23.2 D5.2
NetC24_1: C24.1 D15.2 L2.1 U6.1
NetC24_2: C24.2 U6.8
NetC31_2: U4.5
NetC32_2: U4.6
NetC38_1: C38.1 U6.3
NetC38_2: C38.2 R50.2
NetC45_1: C45.1 R46.1 R47.2 U6.4
NetD1_2: D1.2 R2.2
NetD3_2: D3.2 R8.2
NetD4_2: D4.2 R11.2
NetD6_2: D6.2 R14.2
NetD7_1: D7.1 LS1.2 Q5.3
NetD8_1: D8.1 H1.2 Q6.3
NetD10_2: R33.1
NetD11_2: R39.1
NetD12_1: D12.1 R44.2
NetD12_2: D12.2 D13.2 Q8.2 Q11.2 R41.1 R44.1
NetIC1_2: IC1.2 R30.1 R31.1
NetIC1_3: IC1.3 R35.1 R37.1
NetIC1_6: IC1.6 R32.2 R34.1
NetJP3_1: JP3.1 R33.2
NetL3_1: L3.1 R25.2
NetQ5_1: Q5.1 R1.2
NetQ6_1: Q6.1 R3.2
NetQ7_1: Q7.1 R9.1
NetQ8_1: Q8.1 Q11.1 R42.2
NetQ10_1: Q10.1 R43.2
NetQ10_3: Q10.3 R40.1 R42.1
NetR2_1: R2.1 R5.1
NetR7_1: R7.1 R8.1
NetR10_2: R10.2 U2.3
NetR11_1: R11.1 R12.1
NetR13_1: R13.1 R14.1
NetR15_2: R15.2 U2.2
NetR16_2: R16.2 U5.4
NetR22_1: R22.1 U4.44
NetR25_1: R25.1 U4.2
NetR26_2: R26.2 U5.5
NetR28_2: R28.2 U4.20
NetR43_1: R43.1
NetR49_2: R49.2 U6.6
NetRF1_1: RF1.1 U2.8
NetRF2_1: RF2.1 U5.6
PGND: C15.2 C16.2 C19.2 C20.2 C33.2 C34.2 Q7.2 R6.1 VIN1.1
Power+: RL1.1 VOUT.1
Power-: RL1.4 VOUT.2
PowerSolider+: Q8.3 R40.2 R41.2 RL1.3
Red: D14.2 JP6.1 R35.2
RESET: R27.1 U4.7
RST: JP2.4 U4.19
SCK: JP2.7 U4.15
sleep: R29.1
SO1_N: R10.1 R26.1
SO1_P: R15.1 R16.1
switch: R9.2 U4.41
temp: C5.2 R4.2 U4.14
temp_solid: U4.13
thermocouple: IC1.1 R30.2 R36.1
TIM1_CH1: U4.29
TIM1_CH1N: U4.26
TIM1_CH2: U4.30
TIM1_CH2N: U4.27
tip_changer: R38.1
TIP_CHANGER_PIN: JP4.1 JP9.1 R39.2
V_IN: C16.1 C33.1 C35.1 C36.1 C37.1 C40.1 C41.1 C42.1 R20.1 R45.2 U6.7 U7.1 VIN1.2
vin_sense: C29.2 R20.2 R23.1 U4.11
Vout_N: R6.2 RL1.5
Vout_P: C15.1 C34.1 R21.1 RL1.2
vout_sense: C30.2 R21.2 R24.1 U4.10
VS1: C2.2 C3.1 C13.1
VS2: C14.2 C22.1 C23.1
pads on no net: IC1.7 R32.1 U2.1 U4.1 U4.22 U4.25 U4.31 U4.32 U4.33 U4.36 U4.42 U4.43 U4.45 U4.46 U7.0 U8.4

## Text inside footprints (layer, text, board x,y; h text height)
LS1: Top Overlay "+" at 18323,2045.5 h60 r90